# Altium PCB timer-v1.PcbDoc
Units mm, origin at the board's own origin, x right, y up, seen from the top; angles counter-clockwise.
Board outline 106 x 80 mm, 2 copper layers (Top Layer, Bottom Layer); 33 components, 36 nets, 164 pads, 0 vias.
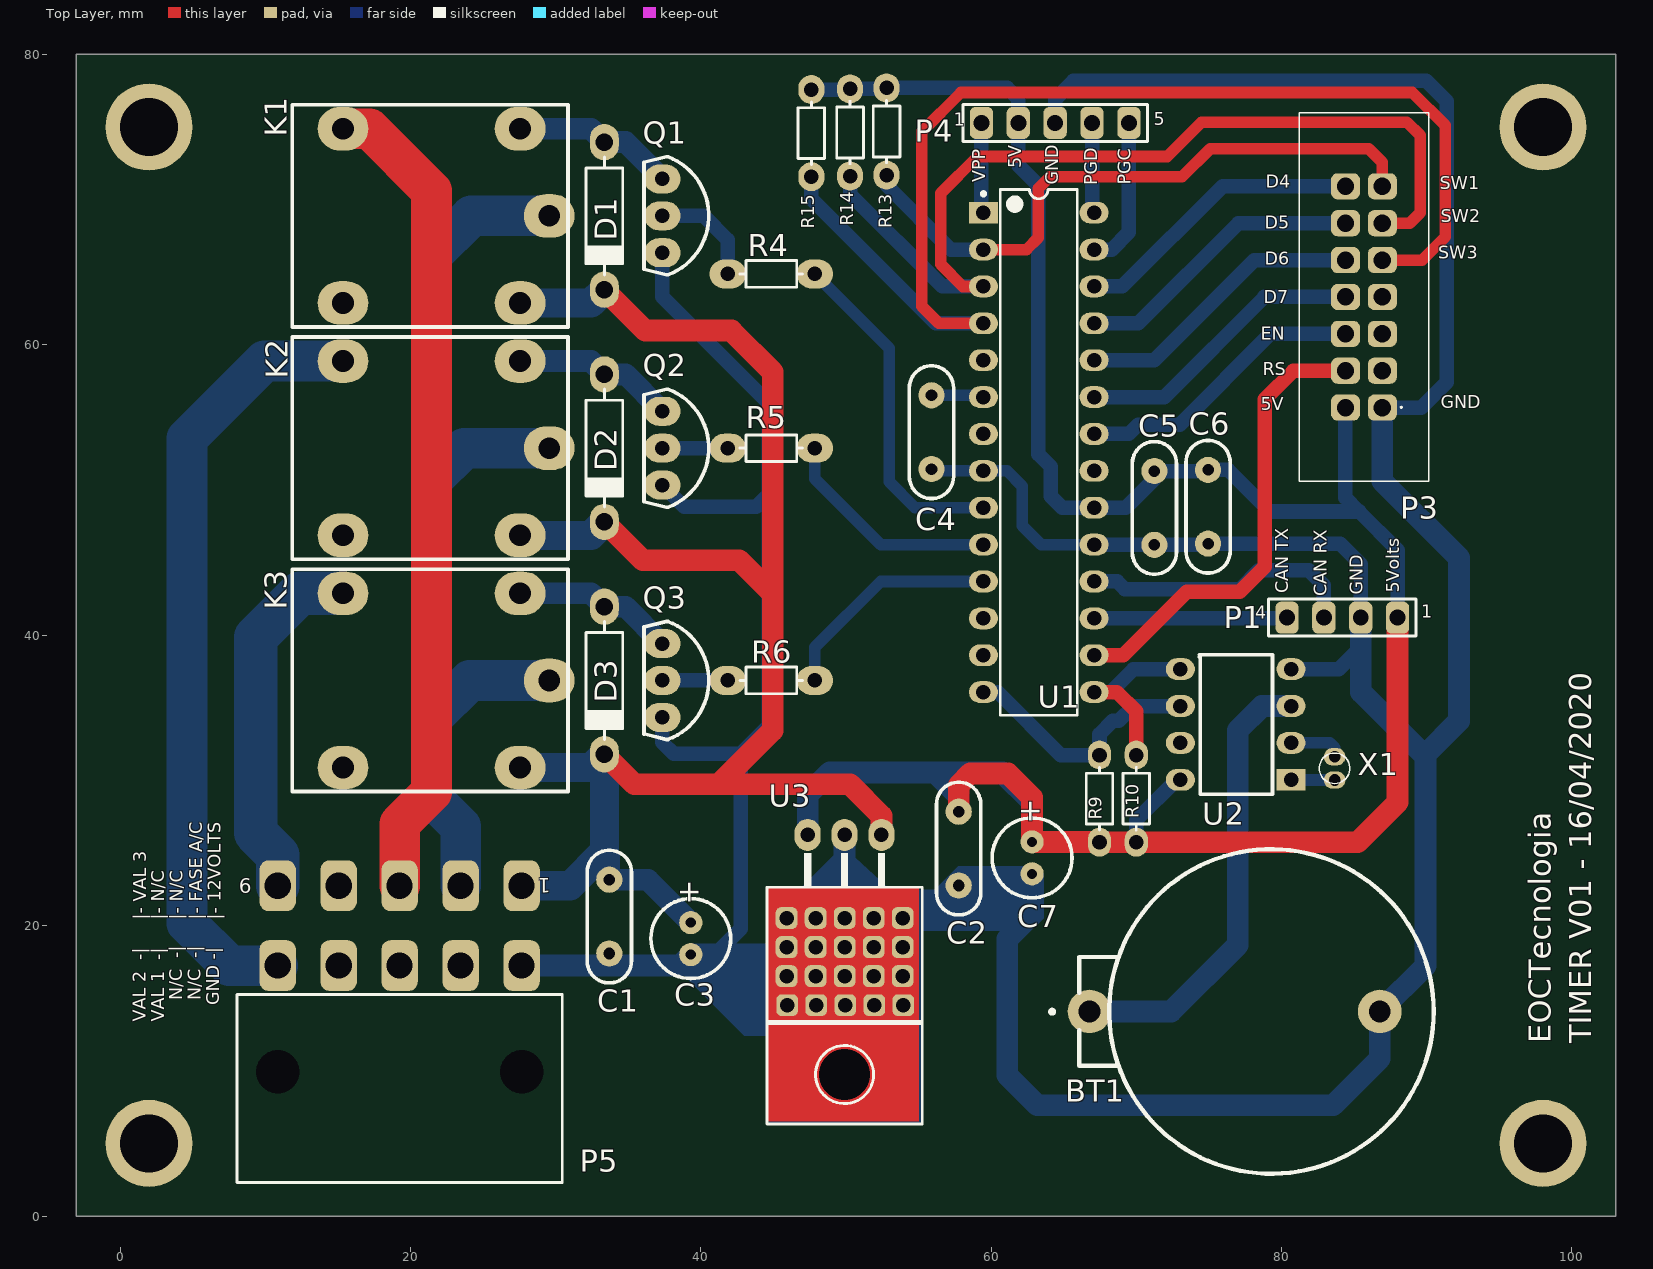
[diagram p0: Top Layer view]
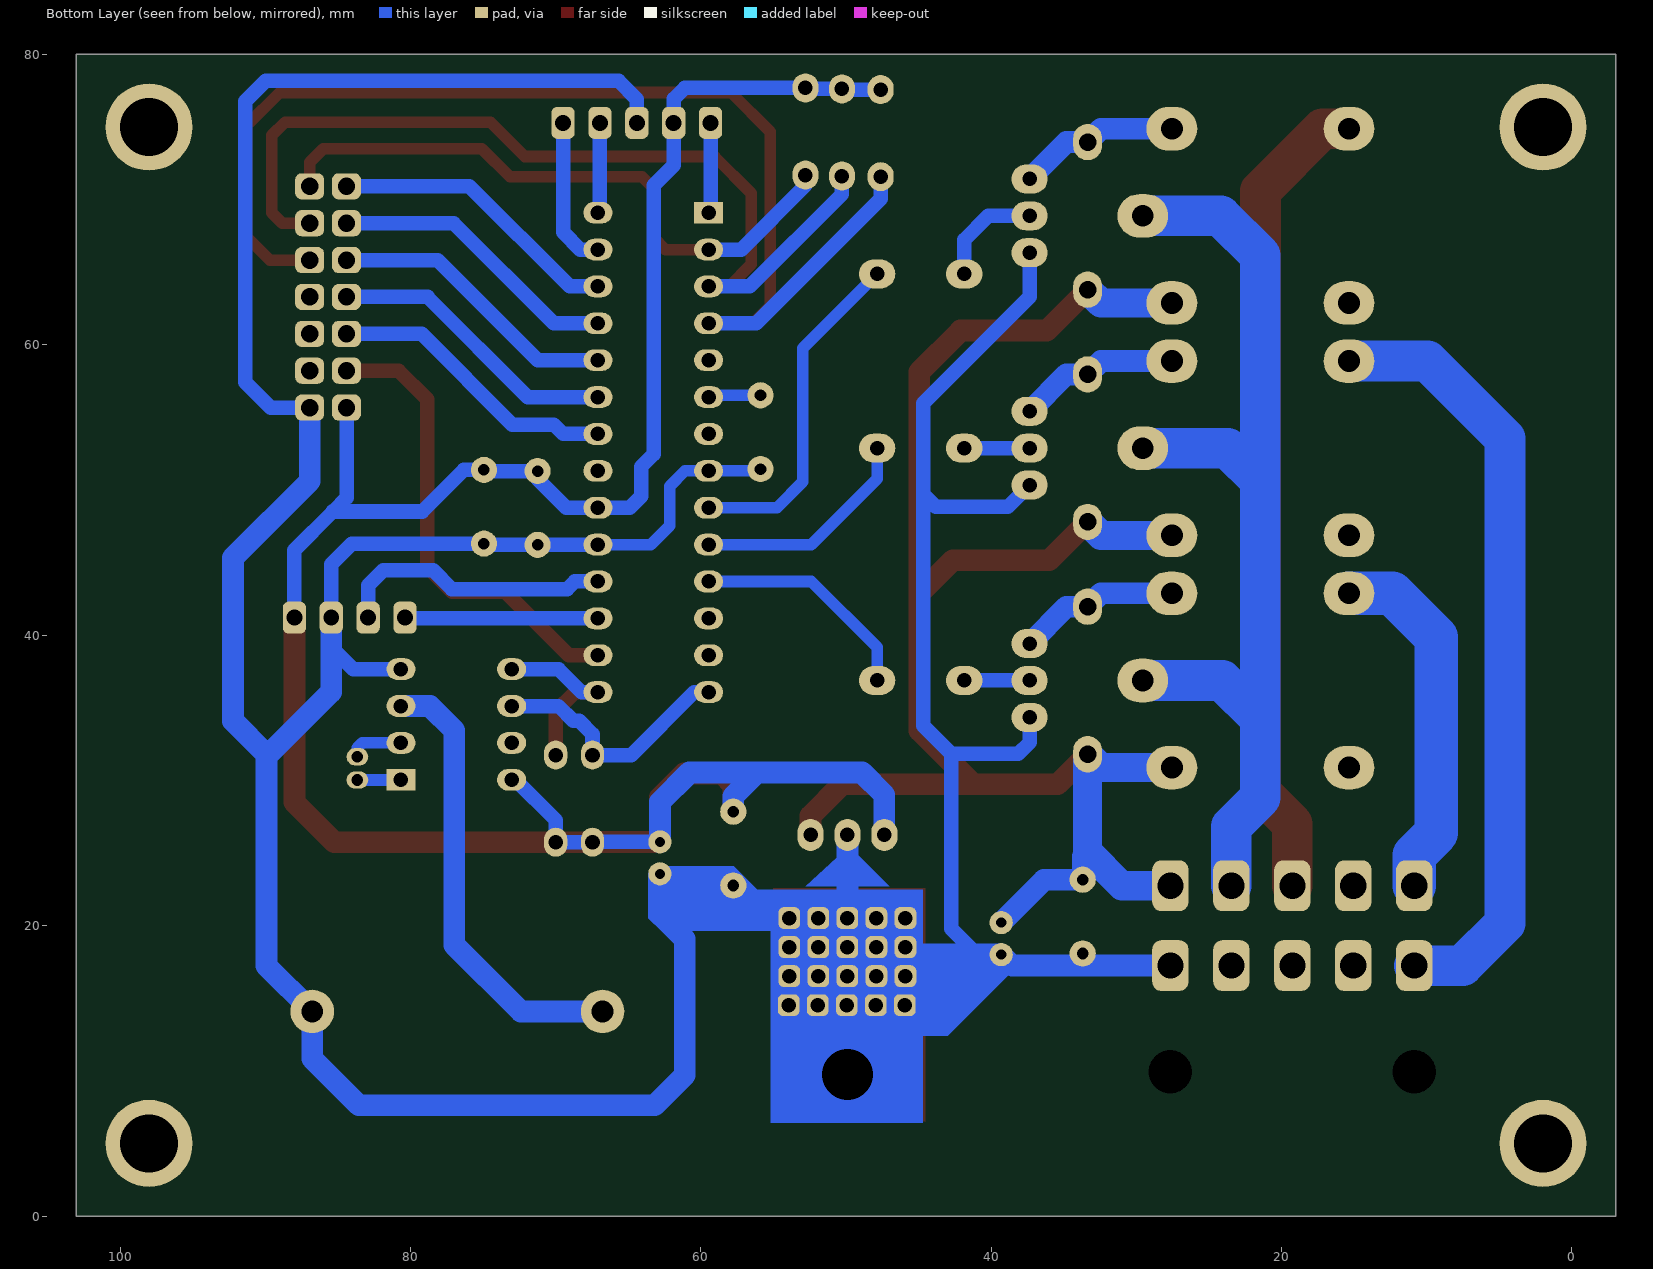
[diagram p1: Bottom Layer view, seen from below]
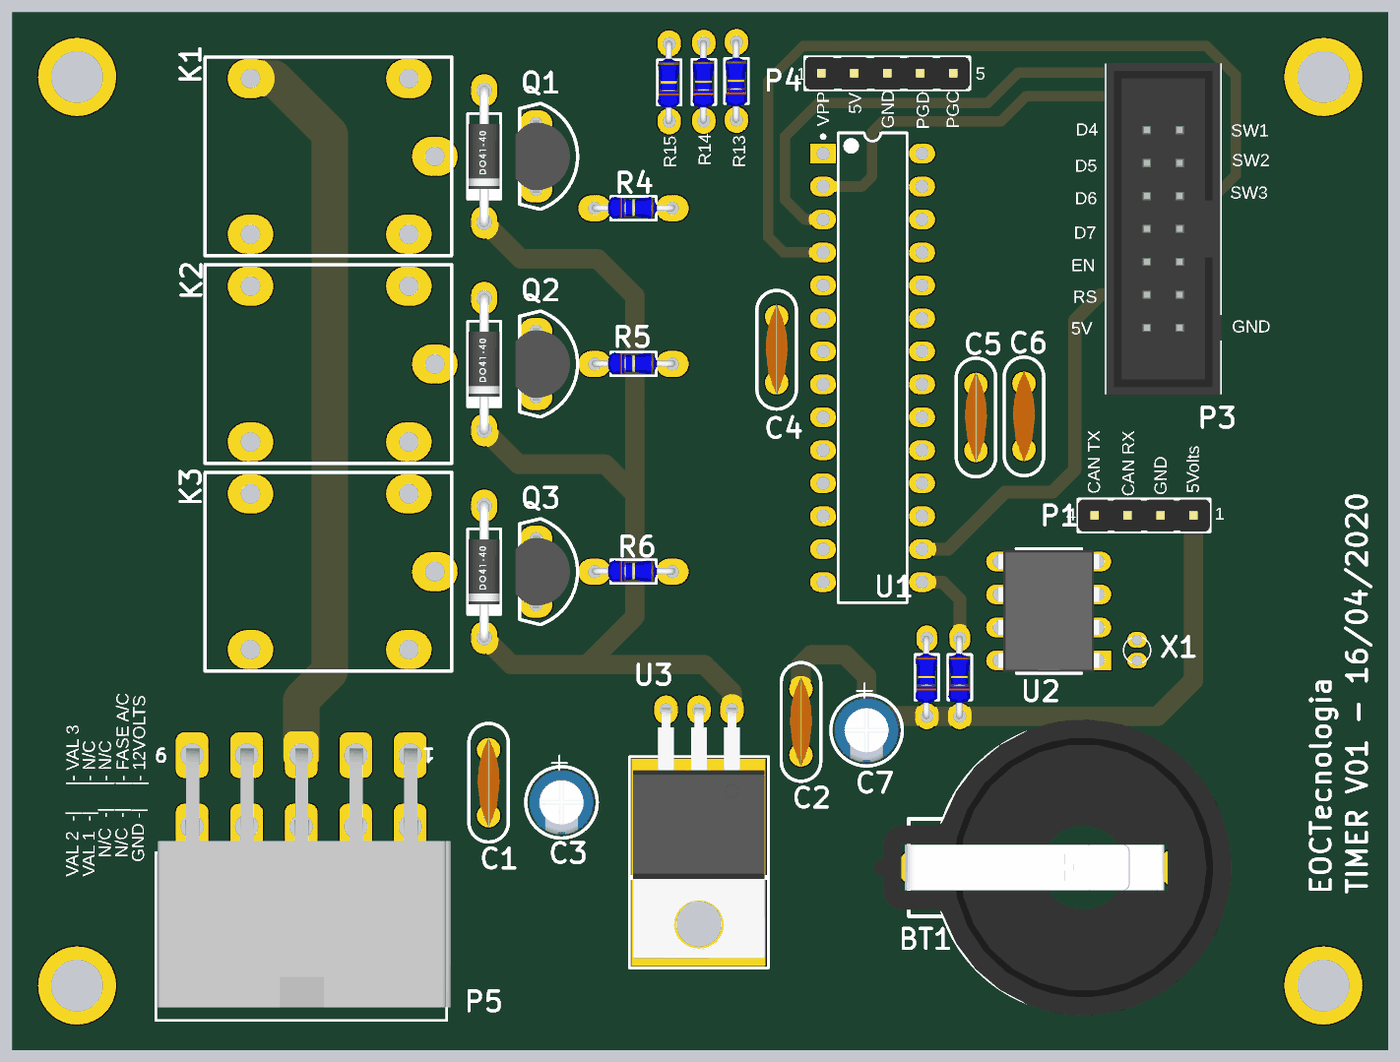
[diagram p2: 3D render of the assembled board from above, using the file's embedded part models]

## Layer stack, top to bottom
Top Solder: solder mask 0.0102, Solder Resist, Dk 3.5
Top Layer: signal copper 0.0356
Dielectric 1: dielectric 0.32, FR-4, Dk 4.8
Bottom Layer: signal copper 0.0356
Bottom Solder: solder mask 0.0102, Solder Resist, Dk 3.5

## Board outline
-3,0 -3,80 103,80 103,0

## Design rules (kind name [scope] priority, off if disabled: settings)
Clearance [All] p1: gap=0.35 ignorepadtopadclearanceinfootprint=FALSE except(0.5: Arc-Arc Arc-Track Arc-SMDPad Arc-THPad Arc-Via Arc-Fill Arc-Poly Arc-Region Arc-Text Arc-Hole Track-Track Track-SMDPad Track-THPad Track-Via Track-Fill Track-Poly Track-Region Track-Text Track-Hole)
PolygonConnect [All] p1: connectstyle=Relief reliefconductorwidth=0.254 reliefentries=4 polygonreliefangle="90 Angle" airgapwidth=0.254
RoutingVias [All] p1: holewidth=0.711 width=1.27 viastyle="Through Hole" minholewidth=0.711 minwidth=1.27 maxholewidth=0.711 maxwidth=1.27
SolderMaskExpansion [All] p1: expansion=0.102
Width [All] p1: maxlimit=3 minlimit=0.5 preferedwidth=1 minimp=50.000000 maximp=50.000000 favimp=50.000000
30 further rules are at their usual default settings.

## Components (designator, comment, footprint, x,y, rotation, side; value= is the part's Value field where it differs from the comment)
BT1 "CR2032" CR2032 79.298,14.089 r180 top
C1 "100nF 50V" CAPACITOR_CERAMICO_5MM 33.698,20.624 r90 top
C2 "100nF 50V" CAPACITOR_CERAMICO_5MM 57.761,25.308 r90 top
C3 "100uF 16V" RADIAL_5.00X12.00X2.00 39.312,19.11 r270 top
C4 "100nF 50V" CAPACITOR_CERAMICO_5MM 55.887,53.985 r90 top
C5 "100nF 50V" CAPACITOR_CERAMICO_5MM 71.238,48.767 r90 top
C6 "100nF 50V" CAPACITOR_CERAMICO_5MM 74.937,48.85 r90 top
C7 "10uF 16V" RADIAL_5.00X12.00X2.00 62.814,24.667 r270 top
D1 "1N4007" DO-41 33.357,68.885 r270 top
D2 "1N4007" DO-41 33.357,52.885 r270 top
D3 "1N4007" DO-41 33.357,36.885 r270 top
K1 "AZ1RC2" "RELE SPDT" 21.357,68.885 r180 top
K2 "AZ1RC2" "RELE SPDT" 21.357,52.885 r180 top
K3 "AZ1RC2" "RELE SPDT" 21.357,36.885 r180 top
P1 "BPSC-5" BPSC-4 84.182,41.217 r180 top
P3 "IDCS-14" "Header 14 pinos" 85.67,63.299 r90 top
P4 "IN-CIRCUIT" BPSC-5 64.406,75.286 r0 top
P5 "MFPT-10" MFPT-10 27.66,22.748 r180 top
Q1 "BC337" TO-92A 37.357,68.885 r90 top
Q2 "BC337" TO-92A 37.357,52.885 r90 top
Q3 "BC337" TO-92A 37.357,36.885 r90 top
R4 "2k2 1/8W" RESISTOR_CR16 44.857,64.885 r180 top
R5 "2k2 1/8W" RESISTOR_CR16 44.857,52.885 r180 top
R6 "2k2 1/8W" RESISTOR_CR16 44.857,36.885 r180 top
R9 "10k 1/8W" "RES CR16"#1 67.459,28.748 r270 top
R10 "10k 1/8W" "RES CR16"#1 69.993,28.748 r270 top
R13 "10k 1/8W" "RES CR16"#2 52.792,74.692 r270 top
R14 "10k 1/8W" "RES CR16"#2 50.277,74.626 r270 top
R15 "10k 1/8W" "RES CR16"#2 47.612,74.582 r270 top
U1 "PIC18F26K80-I/SP" SPDIP300-SP28 63.274,52.593 r0 top
U2 "DS1307" DS1307 76.839,33.856 r180 top
U3 "LM7805CT" TO220_90 49.901,16.293 r90 top
X1 "32.768Khz" "CRISTAL 32Khz" 83.651,30.829 r270 top

## Footprints (in the part's own frame and the unit in brackets; to place one, negate y for a bottom-side part, rotate by r counter-clockwise, add the part's x,y. Pads: shape width x height; smd on the part's side, far side on the other; paste and mask are expansions set on the pad)
BPSC-4 [mm]
  rrect50% 1.6x2.2 hole 1.1: 1(-3.81,0) 2(-1.27,0) 3(1.27,0) 4(3.81,0)
  silkscreen extent -5.08,-1.27 5.08,1.27, body extent -5.08,-1.24 5.08,1.25, height 8.54
BPSC-5 [mm]
  rrect50% 1.6x2.2 hole 1.1: 1(-5.08,0) 2(-2.54,0) 3(0,0) 4(2.54,0) 5(5.08,0)
  silkscreen extent -6.35,-1.27 6.35,1.27, body extent -6.35,-1.24 6.35,1.24, height 8.54
CAPACITOR_CERAMICO_5MM [mm]
  round 1.8 hole 0.8: 1(-2.54,0) 2(2.54,0)
  silkscreen extent -4.57,-1.52 4.57,1.52, body extent -3.49,-0.85 3.5,0.85, height 7
CR2032 [mm] "CR2032 BS-7"
  round 3 hole 1.5: 1(12.534,0) 2(-7.466,0)
  silkscreen extent -11.18,-11.17 15.22,11.17, body extent -11.6,-11.4 15.9,11.4, height 6.4
"CRISTAL 32Khz" [mm] "Cristal 32.768KHz Cilindro"
  oval 1.2x1.5 hole 0.8: 1(-0.8,0) 2(0.8,0)
  silkscreen extent -1.06,-1.05 1.04,1.05
DO-41 [mm]
  oval 2.5x2 hole 1.2: 1(-5.08,0) 2(5.08,0)
  silkscreen extent -4.06,-1.27 4.06,1.27, body extent -5.43,-1.2 5.43,1.2, height 2.53
DS1307 [mm] "PDIP-8"
  rect 2x1.5 hole 1: 1(-3.81,3.81)
  round 1 on Top Overlay: 1(-1.69,3.93)
  oval 2x1.5 hole 1: 2(-3.81,1.27) 3(-3.81,-1.27) 4(-3.81,-3.81) 5(3.81,-3.81) 6(3.81,-1.27) 7(3.81,1.27) 8(3.81,3.81)
  silkscreen extent -2.53,-4.8 2.49,4.8, body extent -3.95,-4.69 3.95,4.69, height 4.57
"Header 14 pinos" [mm] "IDCS 14 pinos"
  rrect50% 1.8x2 hole 1.2: 1(-7.62,-1.27) 2(-7.62,1.27) 3(-5.08,-1.27) 4(-5.08,1.27) 5(-2.54,-1.27) 6(-2.54,1.27) 7(0,-1.27) 8(0,1.27) 9(2.54,-1.27) 10(2.54,1.27) 11(5.08,-1.27) 12(5.08,1.27) 13(7.62,-1.27) 14(7.62,1.27)
  silkscreen extent -12.7,-4.45 12.7,4.45, body extent -12.79,-4.5 12.79,4.4, height 9
MFPT-10 [mm] "MINI FIT - Conector modular miniatura"
  round 0 hole 3: 0(0,12.8) 0(16.8,12.8)
  rrect50% 2.5x3.5 hole 1.8: 1(0,0) 2(0,5.5) 3(4.2,0) 4(4.2,5.5) 5(8.4,0) 6(8.4,5.5) 7(12.6,0) 8(12.6,5.5) 9(16.8,0) 10(16.8,5.5)
  silkscreen extent -2.8,7.5 19.6,20.45, body extent -3.14,-0.51 19.46,19.43, height 11.4
RADIAL_5.00X12.00X2.00 [mm]
  round 1.6 hole 0.7: 1(-1.1,0) 2(1.1,0)
  silkscreen extent -2.75,-2.75 2.75,2.75, body extent -2.5,-2.5 2.5,2.5, height 11
"RELE SPDT" [mm]
  oval 3.5x3 hole 1.5: 1(-8.2,0) 2(6,-6) 3(6,6) 4(-6.2,6) 5(-6.2,-6)
  silkscreen extent -9.5,-7.65 9.5,7.65, body extent -9.4,-7.49 9.4,7.51, height 15.4
"RES CR16"#1 [mm]
  oval 2x1.6 hole 1: 1(-3,0) 2(3,0)
  silkscreen extent -2.15,-0.91 2.15,0.91, body extent -3.2,-0.89 3.2,0.81, height 1.71
"RES CR16"#2 [mm]
  oval 2x1.8 hole 1: 1(-3,0) 2(3,0)
  silkscreen extent -2.15,-0.91 2.15,0.91, body extent -3.2,-0.89 3.2,0.81, height 1.71
RESISTOR_CR16 [mm]
  oval 2.5x2 hole 1: 1(-3,0) 2(3,0)
  silkscreen extent -2.15,-0.91 2.15,0.91, body extent -3.2,-0.89 3.2,0.81, height 1.71
SPDIP300-SP28 [mm] "DIP, 28-Leads, Row Spacing 7.62mm, Pitch 2.54mm, Body 34.9x6.8mm"
  rect 2x1.5 hole 1: 1(-3.81,16.51)
  oval 2x1.5 hole 1: 2(-3.81,13.97) 3(-3.81,11.43) 4(-3.81,8.89) 5(-3.81,6.35) 6(-3.81,3.81) 7(-3.81,1.27) 8(-3.81,-1.27) 9(-3.81,-3.81) 10(-3.81,-6.35) 11(-3.81,-8.89) 12(-3.81,-11.43) 13(-3.81,-13.97) 14(-3.81,-16.51) 15(3.81,-16.51) 16(3.81,-13.97) 17(3.81,-11.43) 18(3.81,-8.89) 19(3.81,-6.35) 20(3.81,-3.81) 21(3.81,-1.27) 22(3.81,1.27) 23(3.81,3.81) 24(3.81,6.35) 25(3.81,8.89) 26(3.81,11.43) 27(3.81,13.97) 28(3.81,16.51)
  silkscreen extent -3.93,-18.1 2.65,18.1, body extent -3.55,-18.1 3.55,18.1, height 5.08
TO220_90 [mm]
  round 0 hole 3.5: 0(-6.55,0)
  oval 2.2x1.8 hole 1: 1(9.95,-2.54) 2(9.95,0) 3(9.95,2.54)
  silkscreen extent -9.95,-5.35 8.71,5.35, body extent -9.17,-5.08 10.11,5.08, height 4.45
TO-92A [mm]
  oval 2x2.5 hole 1: 1(2.54,0) 2(0,0) 3(-2.54,0)
  silkscreen extent -4.06,-3.19 4.06,1.27, body extent -2.79,-2.61 2.79,1.59, height 8

## Part data
BT1: library part "CR2032 BS-7"
C1 C2 C4 C5 C6: library part "Cap 100nF 50V", "CAP CER 0.1UF 50V 10% RADIAL", Capacitance=0.1µF, Manufacturer="TDK Corporation", Manufacturer Part Number=FK28X7R1H104K, Operating Temperature="-55°C ~ 125°C", Package / Case=Radial, Ratings=-, Supplier Part Number 1=445-5258-ND, Temperature Coefficient=X7R, Tolerance=±10%, Voltage - Rated=50V, Applications="General Purpose", Category=Capacitors, ComponentLink1Description=http://product.tdk.com/capacitor/leadmlcc/en/documents/leadmlcc_commercial_general_en.pdf, ComponentLink1URL=http://product.tdk.com/capacitor/leadmlcc/en/documents/leadmlcc_commercial_general_en.pdf, Features=-, Height - Seated (Max)="0.217\" (5.50mm)", Lead Spacing="0.197\" (5.00mm)", Lead Style="Formed Leads - Kinked", Mounting Type="Through Hole", Packaging=Bulk, Pricing 1="1=0.3, 10=0.204, 100=0.1156, 250=0.0918, 500=0.0816, 1000=0.06999, 5000=0.06166, 10000=0.05833, 25000=0.05333 (USD)", RoHS="RoHS Compliant", Size / Dimension="0.157\" L x 0.098\" W (4.00mm x 2.50mm)", Stock 1=9266, Supplier 1=Digi-Key, Thickness (Max)=-
C3 C7: library part "Cap 10uF 16V", "CAP ALUM 10UF 20% 16V RADIAL", Capacitance=10µF, ESR (Equivalent Series Resistance)=-, Lifetime @ Temp.="2000 Hrs @ 85°C", Manufacturer="Panasonic Electronic Components", Manufacturer Part Number=ECA-1CM100, Operating Temperature="-40°C ~ 85°C", Package / Case="Radial, Can", Ripple Current=30mA, Supplier Part Number 1=P5134-ND, Tolerance=±20%, Voltage Rating=16V, Applications="General Purpose", Category=Capacitors, ComponentLink1Description=http://industrial.panasonic.com/www-cgi/jvcr13pz.cgi?E+PZ+3+ABA0012+ECA1CM100+7+WW, ComponentLink1URL=http://industrial.panasonic.com/www-cgi/jvcr13pz.cgi?E+PZ+3+ABA0012+ECA1CM100+7+WW, Height - Seated (Max)="0.472\" (12.00mm)", Impedance=-, Lead Spacing="0.079\" (2.00mm)", Mounting Type="Through Hole", Packaging=Bulk, Pricing 1="1=0.2, 50=0.0806, 100=0.068, 500=0.04654, 1000=0.04117, 5000=0.0358, 10000=0.03401, 25000=0.03043 (USD)", RoHS="RoHS Compliant", Size / Dimension="0.197\" Dia (5.00mm)", Stock 1=18099, Supplier 1=Digi-Key, Surface Mount Land Size=-, Type=-
D1 D2 D3: library part "Diodo 1N4007", "DIODE GEN PURP 1KV 1A DO41", Base Part Number=RGP30K, Capacitance @ Vr, F="8pF @ 4V, 1MHz", Current - Average Rectified (Io)=1A, Current - Reverse Leakage @ Vr="5µA @ 1000V", Manufacturer="Diodes Incorporated", Manufacturer Part Number=1N4007G-T, Operating Temperature - Junction="-65°C ~ 175°C", Package / Case="DO-204AL, DO-41, Axial", Supplier Device Package=DO-41, Supplier Part Number 1=1N4007GDICT-ND, Voltage - Forward (Vf) (Max) @ If="1V @ 1A", Category="Discrete Semiconductor Products", ComponentLink1Description=https://www.diodes.com/assets/Datasheets/ds29002.pdf, ComponentLink1URL=https://www.diodes.com/assets/Datasheets/ds29002.pdf, ComponentLink2Description=http://www.vishay.com/docs/88704/rgp30a.pdf, ComponentLink2URL=http://www.vishay.com/docs/88704/rgp30a.pdf, Código=2, Diode Type=Standard, Montagem=PTH, Mounting Type="Through Hole", Packaging="Cut Tape (CT)", Part Status=Active, Pricing 1="1=0.4, 10=0.299, 100=0.1694, 500=0.11216, 1000=0.08599 (USD)", Pricing 2="2000=0.38779 (USD)", RoHS="RoHS Compliant", Speed="Standard Recovery >500ns, > 200mA (Io)", Stock 1=46214, Stock 2=0, Supplier 1=Digi-Key, Supplier 2=Digi-Key, Supplier Part Number 2=RGP30K-E3/73-ND
K1 K2 K3: library part "Rele AZ1RC2", "RELAY GEN PURPOSE SPDT 10A 12V", Coil Power="360 mW", Coil Resistance="400 Ohms", Coil Voltage=12VDC, Manufacturer=Metaltex, Operating Temperature="-40°C ~ 85°C", Supplier Part Number 1=Z1012-ND, Switching Voltage="250VAC, 30VDC - Max", Turn Off Voltage (Min)="1.2 VDC", Turn On Voltage (Max)="9 VDC", Category=Relays, Coil Type="Non Latching", ComponentLink1Description=http://www.metaltex.com.br/downloads/AZ.pdf, ComponentLink1URL=http://www.metaltex.com.br/downloads/AZ.pdf, Contact Form="SPDT (1 Form C)", Contact Material="Silver Tin Oxide (AgSnO)", Código=2567, Manufacturer Part Number=AZ1RC2, Montagem=PTH, Mounting Type="Through Hole", Packaging=Tray, Part Status=Active, Pricing 1="1=1.33, 10=1.247, 25=1.108, 50=1.0526, 100=0.9972, 250=0.8864, 500=0.831 (USD)", Relay Type="General Purpose", RoHS="RoHS Compliant", Stock 1=37370, Supplier 1=Digi-Key, Termination Style="PC Pin"
P1: library part "Barra de pinos simples 180º, 4 pinos", "CONN HEADER 4POS 2.54MM VERT", Color=Black, Manufacturer="Molex Inc.", Manufacturer Part Number=0022284040, Supplier Part Number 1=WM50014-04-ND, Category="Connectors, Interconnects", ComponentLink1Description=http://www.molex.com/pdm_docs/sd/022284040_sd.pdf, ComponentLink1URL=http://www.molex.com/pdm_docs/sd/022284040_sd.pdf, Connector Type="Header, Unshrouded, Breakaway", Contact Finish=Tin, Contact Finish Thickness="100µin (2.54µm)", Contact Mating Length="0.240\" (6.10mm)", Contact Type="Male Pin", Fastening Type=-, Features=-, Mounting Type="Through Hole", Number of Positions=4, Number of Positions Loaded=All, Number of Rows=1, Packaging=Bulk, Pitch="0.100\" (2.54mm)", Pricing 1="1=0.25, 10=0.22, 100=0.1811, 500=0.14314, 1000=0.12288, 5000=0.1121, 10000=0.10779 (USD)", RoHS="RoHS Compliant", Row Spacing=-, Stock 1=418, Supplier 1=Digi-Key, Termination=Solder
P3: library part "HEADER - 14P 180º", DataSheet=https://www.metaltex.com.br/assets/produtos/pdf/idc.pdf, Descrição="IDCS Metaltex"
P4: library part "Barra de pinos simples 180º, 5 pinos", "CONN HEADER 5POS 2.54MM VERT", Color=Black, Manufacturer="Molex Inc", Manufacturer Part Number=0022284050, Supplier Part Number 1=WM50014-05-ND, Category="Connectors, Interconnects", ComponentLink1Description=http://www.molex.com/pdm_docs/sd/022284050_sd.pdf, ComponentLink1URL=http://www.molex.com/pdm_docs/sd/022284050_sd.pdf, Connector Type="Header, Unshrouded, Breakaway", Contact Finish=Tin, Contact Finish Thickness="100µin (2.54µm)", Contact Mating Length="0.240\" (6.10mm)", Contact Type="Male Pin", Fastening Type=-, Features=-, Mounting Type="Through Hole", Number of Positions=5, Number of Positions Loaded=All, Number of Rows=1, Packaging=Bulk, Pitch="0.100\" (2.54mm)", Pricing 1="1=0.27, 10=0.24, 100=0.1976, 500=0.15622, 1000=0.13411, 5000=0.12234, 10000=0.11764 (USD)", RoHS="RoHS Compliant", Row Spacing=-, Stock 1=0, Supplier 1=Digi-Key, Termination=Solder
P5: "MINI FIT - Conector modular miniatura", Capacidade do contato=7A, Resistência de contato inicial máx.=20M, Resistência de isolação="1000M (500VCC)", Temperatura de operação="-25 ~ 85ºC", Bitola aplicável de cabo para os terminais de crimpar="22 ~ 18 AWG (0,3mm2 ~ 0,75mm2 )", DataSheet=www.metaltex.com.br/assets/produtos/pdf/mf.pdf, Material do isolador="PA 66 UL94V-2", Material dos terminais dos conectores de PCI="Latão estanhado", Rigidez dielétrica="1500 VCA / VAC (1minuto / minute)", Tensão de operação máx.=250VAC/VCC, Terminal fêmea para cabos AWG=MFTF-1822
Q1 Q2 Q3: library part "Transistor NPN BC337", "TRANSISTOR NPN 45V 800MA TO-92", Current - Collector (Ic) (Max)=800mA, Current - Collector Cutoff (Max)=100nA, DC Current Gain (hFE) (Min) @ Ic, Vce="160 @ 100mA, 1V", Frequency - Transition=100MHz, Manufacturer="Fairchild Semiconductor", Manufacturer Part Number=BC33725TA, Package / Case="TO-226-3, TO-92-3 (TO-226AA) Formed Leads", Power - Max=625mW, Supplier Device Package=TO-92-3, Supplier Part Number 1=BC33725TACT-ND, Voltage - Collector Emitter Breakdown (Max)=45V, Category="Discrete Semiconductor Products", ComponentLink1Description=http://www.fairchildsemi.com/datasheets/BC/BC337.pdf, ComponentLink1URL=http://www.fairchildsemi.com/datasheets/BC/BC337.pdf, Mounting Type="Through Hole", Packaging="Cut Tape (CT)", Pricing 1="1=0.23, 10=0.21, 25=0.1512, 100=0.1175, 250=0.07384, 500=0.06292, 1000=0.04287 (USD)", RoHS="RoHS Compliant", Stock 1=10445, Supplier 1=Digi-Key, Transistor Type=NPN, Vce Saturation (Max) @ Ib, Ic="700mV @ 50mA, 500mA"
R4 R5 R6: library part "Res 2k2 1/8W 5%", "RES 2K2 OHM 1/8W 5% AXIAL CARBON FILM", Manufacturer="Stackpole Electronics Inc.", Manufacturer Part Number=CF18JT2K20, Operating Temperature="-55°C ~ 155°C", Package / Case=Axial, Power (Watts)="0.125W, 1/8W", Resistance (Ohms)=2.2k, Supplier Part Number 1=CF18JT2K20CT-ND, Temperature Coefficient="0/ -400ppm/°C", Tolerance=±5%, Category=Resistors, ComponentLink1Description=http://www.seielect.com/catalog/SEI-CF_CFM.pdf, ComponentLink1URL=http://www.seielect.com/catalog/SEI-CF_CFM.pdf, Composition="Carbon Film", Features="Flame Retardant Coating, Safety", Height=-, Number of Terminations=2, Packaging="Cut Tape (CT)", Pricing 1="1=0.1, 10=0.065, 50=0.0356, 100=0.0271, 250=0.02016, 500=0.01488, 1000=0.00992, 2500=0.00837 (USD)", RoHS="RoHS Compliant", Size / Dimension="0.067\" Dia x 0.130\" L (1.70mm x 3.30mm)", Stock 1=61435, Supplier 1=Digi-Key, Supplier Device Package=Axial
R9 R10 R13 R14 R15: library part "Res 10k 1/8W 5% CR16", "RES 10K OHM 1/8W 5% AXIAL", Manufacturer="Stackpole Electronics Inc.", Manufacturer Part Number=CF18JT10K0, Operating Temperature="-55°C ~ 155°C", Package / Case=Axial, Power (Watts)="0.125W, 1/8W", Supplier Part Number 1=CF18JT10K0CT-ND, Temperature Coefficient="0/ -500ppm/°C", Tolerance=±5%, Category=Resistors, ComponentLink1Description=https://www.seielect.com/Catalog/SEI-CF_CFM.pdf, ComponentLink1URL=https://www.seielect.com/Catalog/SEI-CF_CFM.pdf, Composition="Carbon Film", Código=255, Failure Rate=-, Features="Flame Retardant Coating, Safety", Height - Seated (Max)=-, Montagem=PTH, Packaging="Cut Tape (CT)", Part Status=Active, Pricing 1="1=0.1, 10=0.049, 25=0.036, 50=0.0272, 100=0.0201, 250=0.01536, 500=0.01228, 1000=0.00904 (USD)", RoHS="RoHS Compliant", Size / Dimension="0.067\" Dia x 0.130\" L (1.70mm x 3.30mm)", Stock 1=291940, Supplier 1=Digi-Key, Supplier Device Package=Axial
U2: "I2C Real-Time Clock", Package=PDIP-8, Supply Voltage=5V
U3: library part LM7805, "IC REG LDO 5V 1A TO220-3", Current - Limit (Min)=-, Current - Output=1A, Manufacturer="Fairchild Semiconductor", Manufacturer Part Number=LM7805ACT, Operating Temperature="0°C ~ 125°C", Package / Case=TO-220-3, Supplier Part Number 1=LM7805ACT-ND, Voltage - Dropout (Typical)="2V @ 1A", Voltage - Input="Up to 35V", Voltage - Output=5V, Category="Integrated Circuits (ICs)", ComponentLink1Description=http://www.fairchildsemi.com/datasheets/LM/LM7805.pdf, ComponentLink1URL=http://www.fairchildsemi.com/datasheets/LM/LM7805.pdf, Mounting Type="Through Hole", Number of Regulators=1, Packaging=Tube, Pricing 1="1=0.67, 10=0.566, 25=0.4956, 100=0.4248, 250=0.36816, 500=0.31152, 1000=0.24072, 2500=0.21948, 5000=0.20532 (USD)", Regulator Topology="Positive Fixed", RoHS="RoHS Compliant", Stock 1=6704, Supplier 1=Digi-Key, Supplier Device Package=TO-220-3
X1: library part "CRISTAL 32Khz", "CRISTAL 32.768 Khz Cilindro"

## Free pads (board coordinates)
  round 6 hole 4: 0(2,5) 0(2,75) 0(98,5) 0(98,75)
  rrect50% 1.5x1.5 hole 1: 2(45.907,16.522) 2(45.907,18.522) 2(45.907,20.522) 2(45.948,14.522) 2(47.907,16.522) 2(47.907,18.522) 2(47.907,20.522) 2(47.948,14.522) 2(49.907,16.522) 2(49.907,18.522) 2(49.907,20.522) 2(49.948,14.522) 2(51.907,16.522) 2(51.907,18.522) 2(51.907,20.522) 2(51.948,14.522) 2(53.907,16.522) 2(53.907,18.522) 2(53.907,20.522) 2(53.948,14.522)

## Nets (pads, with @x,y where several pads share a name; then routed paths per layer and width w, separated by ;. In a path a pad name is that pad's centre, name@x,y a point inside that pad or via, vN(x,y) a via of type N, cw(c..) or ccw(c..) an arc to the next point about the centre after c; other vN are vias at no path point)
5V: C2.2 C5.2 C6.2 C7.1 P1.1 P3.2 P4.2 R9.2 R10.2 R13.1 R14.1 R15.1 U1.20 U2.8 U3.3 | length 171.7
  Top Layer w1.5: C2.2 57.761,29.676 58.567,30.482 61.148,30.482 62.814,28.816 C7.1 67.44,25.767 R9.2 R10.2 85.244,25.748 87.992,28.496 P1.1
  Bottom Layer w1: R15.1 50.232,77.582 R14.1 52.726,77.626 R13.1 61.109,77.692 61.866,76.935 P4.2 61.866,72.363 63.246,70.982 63.246,52.48 64.107,51.619 64.107,49.576 64.899,48.783 U1.20 69.268,48.783 71.238,50.752 C5.2 74.854,51.307 C6.2 76.311,51.39 79.178,48.523 85.333,48.523 ; C7.1 67.44,25.767 R9.2 R10.2 69.993,27.273 72.765,30.046 U2.8 ; P3.2 84.4,49.456 85.333,48.523 ; P1.1 87.992,45.864 85.333,48.523
  Bottom Layer w1.5: U3.3 47.361,29.009 48.899,30.547 56.132,30.547 ; C2.2 57.761,28.918 56.132,30.547 ; C7.1 62.814,28.512 60.78,30.547 56.132,30.547
12V: C1.2 C3.1 D1.2 D2.2 D3.2 K1.4 K2.4 K3.4 P5.1 U3.1 | length 120.5
  Top Layer w1.5: D3.2 35.432,29.73 41.249,29.73 ; D2.2 35.995,45.167 42.647,45.167 44.96,42.854 ; D1.2 36.181,60.981 42.109,60.981 44.96,58.13 44.96,42.854 ; U3.1 52.441,27.566 50.277,29.73 41.249,29.73 ; 41.249,29.73 44.96,33.442 44.96,42.854
  Bottom Layer w1.5: 33.357,25.1 33.698,24.759 C1.2 36.358,23.164 C3.1
  Bottom Layer w2: K3.4 32.437,30.885 D3.2 33.357,25.1 31.005,22.748 P5.1 ; K2.4 32.437,46.885 D2.2 ; K1.4 32.437,62.885 D1.2
"FASE AC": K1.1 K2.1 K3.1 P5.3 | length 71.7
  Bottom Layer w2.8: P5.3 23.46,26.83 21.465,28.825 21.465,34.258 ; K3.1 24.092,36.885 21.465,34.258 ; K2.1 23.712,52.885 21.465,50.638 ; K1.1 24.199,68.885 21.465,66.152 21.465,50.638 ; 21.465,34.258 21.465,50.638
GND: BT1.2 C1.1 C2.1 C3.2 C4.1 C5.1 C6.1 C7.2 P1.2 P3.1 P4.3 P5.2 pad.2 Q1.3 Q2.3 Q3.3 U1.8 U1.19 U2.4 U3.0 U3.2 | length 306
  Bottom Layer w0.8: C4.1 56.009,51.323 U1.8 61.088,51.323 62.145,50.266 62.145,47.545 63.447,46.243 U1.19
  Bottom Layer w1: Q3.3 37.357,32.614 38.145,31.826 42.754,31.826 ; Q2.3 38.844,48.859 43.823,48.859 44.691,49.727 ; Q1.3 37.357,63.306 44.691,55.972 44.691,49.727 ; 40.966,18.01 42.754,19.798 42.754,31.826 ; P4.3 64.406,76.929 65.667,78.19 89.977,78.19 91.376,76.791 91.376,57.428 89.626,55.679 P3.1 ; U1.19 71.223,46.243 C5.1 74.854,46.227 C6.1 84.04,46.31 85.452,44.899 P1.2 ; U2.4 83.931,37.666 85.452,39.186 ; 42.754,31.826 44.691,33.763 44.691,49.727
  Bottom Layer w1.5: P5.2 38.55,17.248 C3.2 40.966,18.01 45.395,18.01 pad.2@45.907,18.522 ; U3.2 49.901,20.528 pad.2@49.907,20.522 ; pad.2@53.907,20.522 57.789,20.522 ; C2.1 57.761,20.55 57.789,20.522 ; P1.2 85.452,39.186 85.452,36.1 89.915,31.637 ; P3.1 86.94,50.614 92.217,45.336 92.217,34.101 89.915,31.799 89.915,31.637 ; 57.789,20.522 59.769,20.522 C7.2 62.814,20.774 61.112,19.072 61.112,9.691 63.177,7.626 83.549,7.626 86.764,10.841 BT1.2 89.915,17.24 89.915,31.637
NetBT1_1: BT1.1 U2.3 | length 31.3
  Bottom Layer w1.5: BT1.1 72.407,14.089 76.984,18.665 76.984,33.456 78.654,35.126 U2.3
NetC4_2: C4.2 U1.6 | length 3.6
  Bottom Layer w0.8: C4.2 59.342,56.525 U1.6
NetD1_1: D1.1 K1.5 Q1.1 | length 11.2
  Bottom Layer w1.5: K1.5 32.437,74.885 D1.1 34.817,73.965 Q1.1
NetD2_1: D2.1 K2.5 Q2.1 | length 11.2
  Bottom Layer w1.5: K2.5 32.437,58.885 D2.1 34.817,57.965 Q2.1
NetD3_1: D3.1 K3.5 Q3.1 | length 11.2
  Bottom Layer w1.5: K3.5 32.437,42.885 D3.1 34.817,41.965 Q3.1
NetP1_3: P1.3 U1.18 | length 19.2
  Bottom Layer w1: U1.18 68.68,43.703 69.214,43.169 77.135,43.169 78.432,44.466 81.883,44.466 82.912,43.437 P1.3
NetP1_4: P1.4 U1.17 | length 13.3
  Bottom Layer w1: U1.17 80.318,41.163 P1.4
NetP3_4: P3.4 U1.16 | length 32.2
  Top Layer w1: U1.16 69.1,38.623 73.482,43.005 77.133,43.005 78.851,44.723 78.851,56.249 80.821,58.219 P3.4
NetP3_6: P3.6 U1.22 | length 20.2
  Bottom Layer w1: U1.22 69.467,53.863 70.114,54.509 72.983,54.509 79.232,60.759 P3.6
NetP3_8: P3.8 U1.23 | length 20.2
  Bottom Layer w1: U1.23 71.926,56.403 78.822,63.299 P3.8
NetP3_9: P3.9 R15.2 U1.4 | length 84.5
  Top Layer w0.8: U1.4 56.395,61.483 55.223,62.655 55.223,74.685 57.921,77.383 89.01,77.383 91.269,75.124 91.269,67.433 89.674,65.839 P3.9
  Bottom Layer w1: R15.2 47.612,70.063 56.193,61.483 U1.4
NetP3_10: P3.10 U1.24 | length 20.2
  Bottom Layer w1: U1.24 71.233,58.943 78.129,65.839 P3.10
NetP3_11: P3.11 R14.2 U1.3 | length 65.2
  Top Layer w0.8: U1.3 58.05,64.023 56.523,65.55 56.523,70.445 59.052,72.974 72.122,72.974 74.487,75.339 88.633,75.339 89.547,74.425 89.547,69.1 88.826,68.379 P3.11
  Bottom Layer w1: R14.2 50.277,70.374 56.628,64.023 U1.3
NetP3_12: P3.12 U1.25 | length 20.2
  Bottom Layer w1: U1.25 70.137,61.483 77.033,68.379 P3.12
NetP3_13: P3.13 R13.2 U1.2 | length 43.6
  Top Layer w0.8: U1.2 62.43,66.563 63.246,67.379 63.246,70.768 64.053,71.574 73.143,71.574 75.079,73.511 85.998,73.511 86.94,72.568 P3.13
  Bottom Layer w1: R13.2 52.792,70.982 57.211,66.563 U1.2
NetP3_14: P3.14 U1.26 | length 20.2
  Bottom Layer w1: U1.26 69.04,64.023 75.936,70.919 P3.14
NetP4_1: P4.1 U1.1 | length 6.3
  Bottom Layer w1: P4.1 59.326,69.241 U1.1 U1.1@59.509,69.148
NetP4_4: P4.4 U1.28 | length 6.3
  Bottom Layer w1: P4.4 66.946,69.241 U1.28 U1.28@67.129,69.148
NetP4_5: P4.5 U1.27 | length 10.4
  Bottom Layer w1: U1.27 68.292,66.563 69.486,67.756 P4.5
NetQ1_2: Q1.2 R4.2 | length 7.5
  Bottom Layer w1: Q1.2 40.195,68.885 41.857,67.222 R4.2
NetQ2_2: Q2.2 R5.2 | length 4.5
  Bottom Layer w1: Q2.2 R5.2
NetQ3_2: Q3.2 R6.2 | length 4.5
  Bottom Layer w1: Q3.2 R6.2
NetR4_1: R4.1 U1.9 | length 23.7
  Bottom Layer w0.8: R4.1 52.974,59.768 52.974,50.562 54.754,48.783 U1.9
NetR5_1: R5.1 U1.10 | length 15.6
  Bottom Layer w0.8: R5.1 47.857,50.769 52.383,46.243 U1.10
NetR6_1: R6.1 U1.11 | length 15.8
  Bottom Layer w0.8: R6.1 47.857,39.174 52.386,43.703 U1.11
NetR9_1: R9.1 U1.14 U2.6 | length 17.6
  Bottom Layer w1: U1.14 60.467,36.083 64.802,31.748 R9.1 67.459,33.185 68.376,34.102 68.78,34.102 69.804,35.126 U2.6
NetR10_1: R10.1 U1.15 U2.5 | length 13.1
  Top Layer w1: U1.15 68.663,36.083 69.993,34.753 R10.1
  Bottom Layer w1: U1.15 68.215,36.083 69.798,37.666 U2.5
NetU2_1: U2.1@80.649,30.046 X1.2 | length 3
  Bottom Layer w0.8: U2.1@80.649,30.046 80.666,30.029 X1.2
NetU2_2: U2.2 X1.1 | length 3.8
  Bottom Layer w0.8: U2.2 83.309,32.586 83.651,32.243 X1.1
VOut_V1: K1.2 P5.5 | length 56.6
  Top Layer w2.8: K1.2 17.179,74.885 21.455,70.609 21.455,29.193 19.26,26.998 P5.5
VOut_V2: K2.2 P5.10 | length 53.8
  Bottom Layer w2.8: P5.10 7.527,17.248 4.613,20.162 4.613,53.552 9.946,58.885 K2.2
VOut_V3: K3.2 P5.9 | length 25
  Bottom Layer w3: P5.9 10.86,24.861 9.338,26.383 9.338,39.849 12.373,42.885 K3.2
pads on no net: K1.3 K2.3 K3.3 P3.3 P3.5 P3.7 P5.0 P5.4 P5.6 P5.7 P5.8 U1.5 U1.7 U1.12 U1.13 U1.21 U2.1@78.529,29.926 U2.7

## Other copper
Top Layer:
  region net GND: 55.005,6.518 55.014,6.527 55.014,22.572 44.536,22.572 44.536,6.503
Bottom Layer:
  region net GND: 55.174,6.426 55.183,6.435 55.183,22.48 44.705,22.48 44.705,6.411
  region net GND: 39.312,18.01 39.075,18.729 38.368,18.022 38.368,17.041 42.976,12.433 44.71,12.433 44.71,18.683 44.641,18.752 44.618,18.729 39.075,18.729
  region net GND: 49.161,25.491 49.161,24.85 47.017,22.706 52.781,22.706 50.636,24.693 50.636,25.511
  region net GND: 55.081,22.484 56.123,22.484 57.738,24.1 63.123,24.1 63.603,23.62 63.603,20.518 62.736,19.652 55.081,19.652

## Silkscreen, mask and mechanical layers (free items; w line width, h text height)
Top Overlay:
  text "5V" at 62.386,72.166 h1.52 r90
  text "VPP" at 59.911,71.198 h1.52 r90
  text "GND" at 64.913,71.036 h1.52 r90
  text "PGC" at 69.916,71.036 h1.52 r90
  text "PGD" at 67.603,70.982 h1.52 r90
  text "D4" at 78.922,70.495 h1.52
  text "SW1" at 90.878,70.423 h1.52
  text "SW2" at 90.949,68.133 h1.52
  text "D5" at 78.851,67.703 h1.52
  text "SW3" at 90.806,65.627 h1.52
  text "D6" at 78.851,65.198 h1.52
  text "D7" at 78.779,62.549 h1.52
  text "EN" at 78.565,60.043 h1.52
  text "RS" at 78.708,57.609 h1.52
  text "GND" at 90.949,55.318 h1.52
  text "5V" at 78.565,55.175 h1.52
  text "5Volts" at 88.409,42.942 h1.52 r90
  text "CAN TX" at 80.781,42.893 h1.52 r90
  text "GND" at 85.915,42.795 h1.52 r90
  text "CAN RX" at 83.422,42.697 h1.52 r90
  text "|- VAL 3" at 2.12,20.409 h1.52 r90
  text "|- N/C" at 3.364,20.409 h1.52 r90
  text "|- N/C" at 4.619,20.409 h1.52 r90
  text "|- FASE A/C" at 5.958,20.409 h1.52 r90
  text "|- 12VOLTS" at 7.238,20.409 h1.52 r90
  text "N/C  -|" at 4.591,14.853 h1.52 r90
  text "N/C  -|" at 5.871,14.853 h1.52 r90
  text "GND -|" at 7.151,14.52 h1.52 r90
  text "VAL 2  -|" at 2.078,13.39 h1.52 r90
  text "VAL 1  -|" at 3.35,13.39 h1.52 r90
  text "EOCTecnologia" at 98.531,11.887 h1.52 r90
  text "TIMER V01 - 16/04/2020" at 101.32,11.909 h1.52 r90
Top Solder:
  region: 55.189,6.426 55.198,6.435 55.198,22.48 44.72,22.48 44.72,6.411
Bottom Solder:
  region: 55.097,6.426 55.106,6.435 55.106,22.48 44.628,22.48 44.628,6.411
Mechanical 1:
  the board outline again, w0.3
Mechanical 13:
  lines w0.5: 128.083,84.584 cw(c130.476,84.465) 130.595,86.858 ; 128.084,21.136 ccw(c130.082,21.037) 129.983,19.039 ; 128.085,21.257 128.085,84.648 ; 130.066,19.071 205.066,19.071 ; 130.422,74.074 205.122,74.074 ; 130.422,86.859 205.122,86.859 ; 204.877,19.105 ccw(c204.996,21.498) 207.39,21.379 ; 205.105,86.812 cw(c204.985,84.419) 207.379,84.3 ; 207.415,21.189 207.415,84.123
  text "TIMER V01" at 131.113,77.975 h5
  text "Camadas: Dupla face." at 131.513,63.391 h5
  text "Acabamento: Hot Air." at 131.674,57.413 h5
  text "Cor Mascara: Preto." at 131.836,51.273 h5
  text "Cor Serigrafia: Branca." at 131.513,44.971 h5
  text "Finished Copper: 1 OZ" at 131.759,38.914 h5

## Text inside footprints (layer, text, board x,y; h text height)
C3: Top Overlay "+" at 38.576,23.17 h1.5 r270
C7: Top Overlay "+" at 62.077,28.727 h1.5 r270
P1: Top Overlay "1" at 89.632,40.888 h1.52; Top Overlay "4" at 78.192,40.836 h1.52
P4: Top Overlay "1" at 57.421,74.778 h1.52; Top Overlay "5" at 71.206,74.801 h1.52
P5: Top Overlay "9" at 9.08,23.258 h1 r180; Top Overlay "1" at 29.66,23.248 h1 r180